# Altium PCB SintetivadorV00.PcbDoc
Units mm, origin at the board's own origin, x right, y up, seen from the top; angles counter-clockwise.
Board outline 36.32 x 39.5 mm, 2 copper layers (Top Layer, Bottom Layer), stack 1.571 mm thick; 43 components, 26 nets, 123 pads, 62 vias.
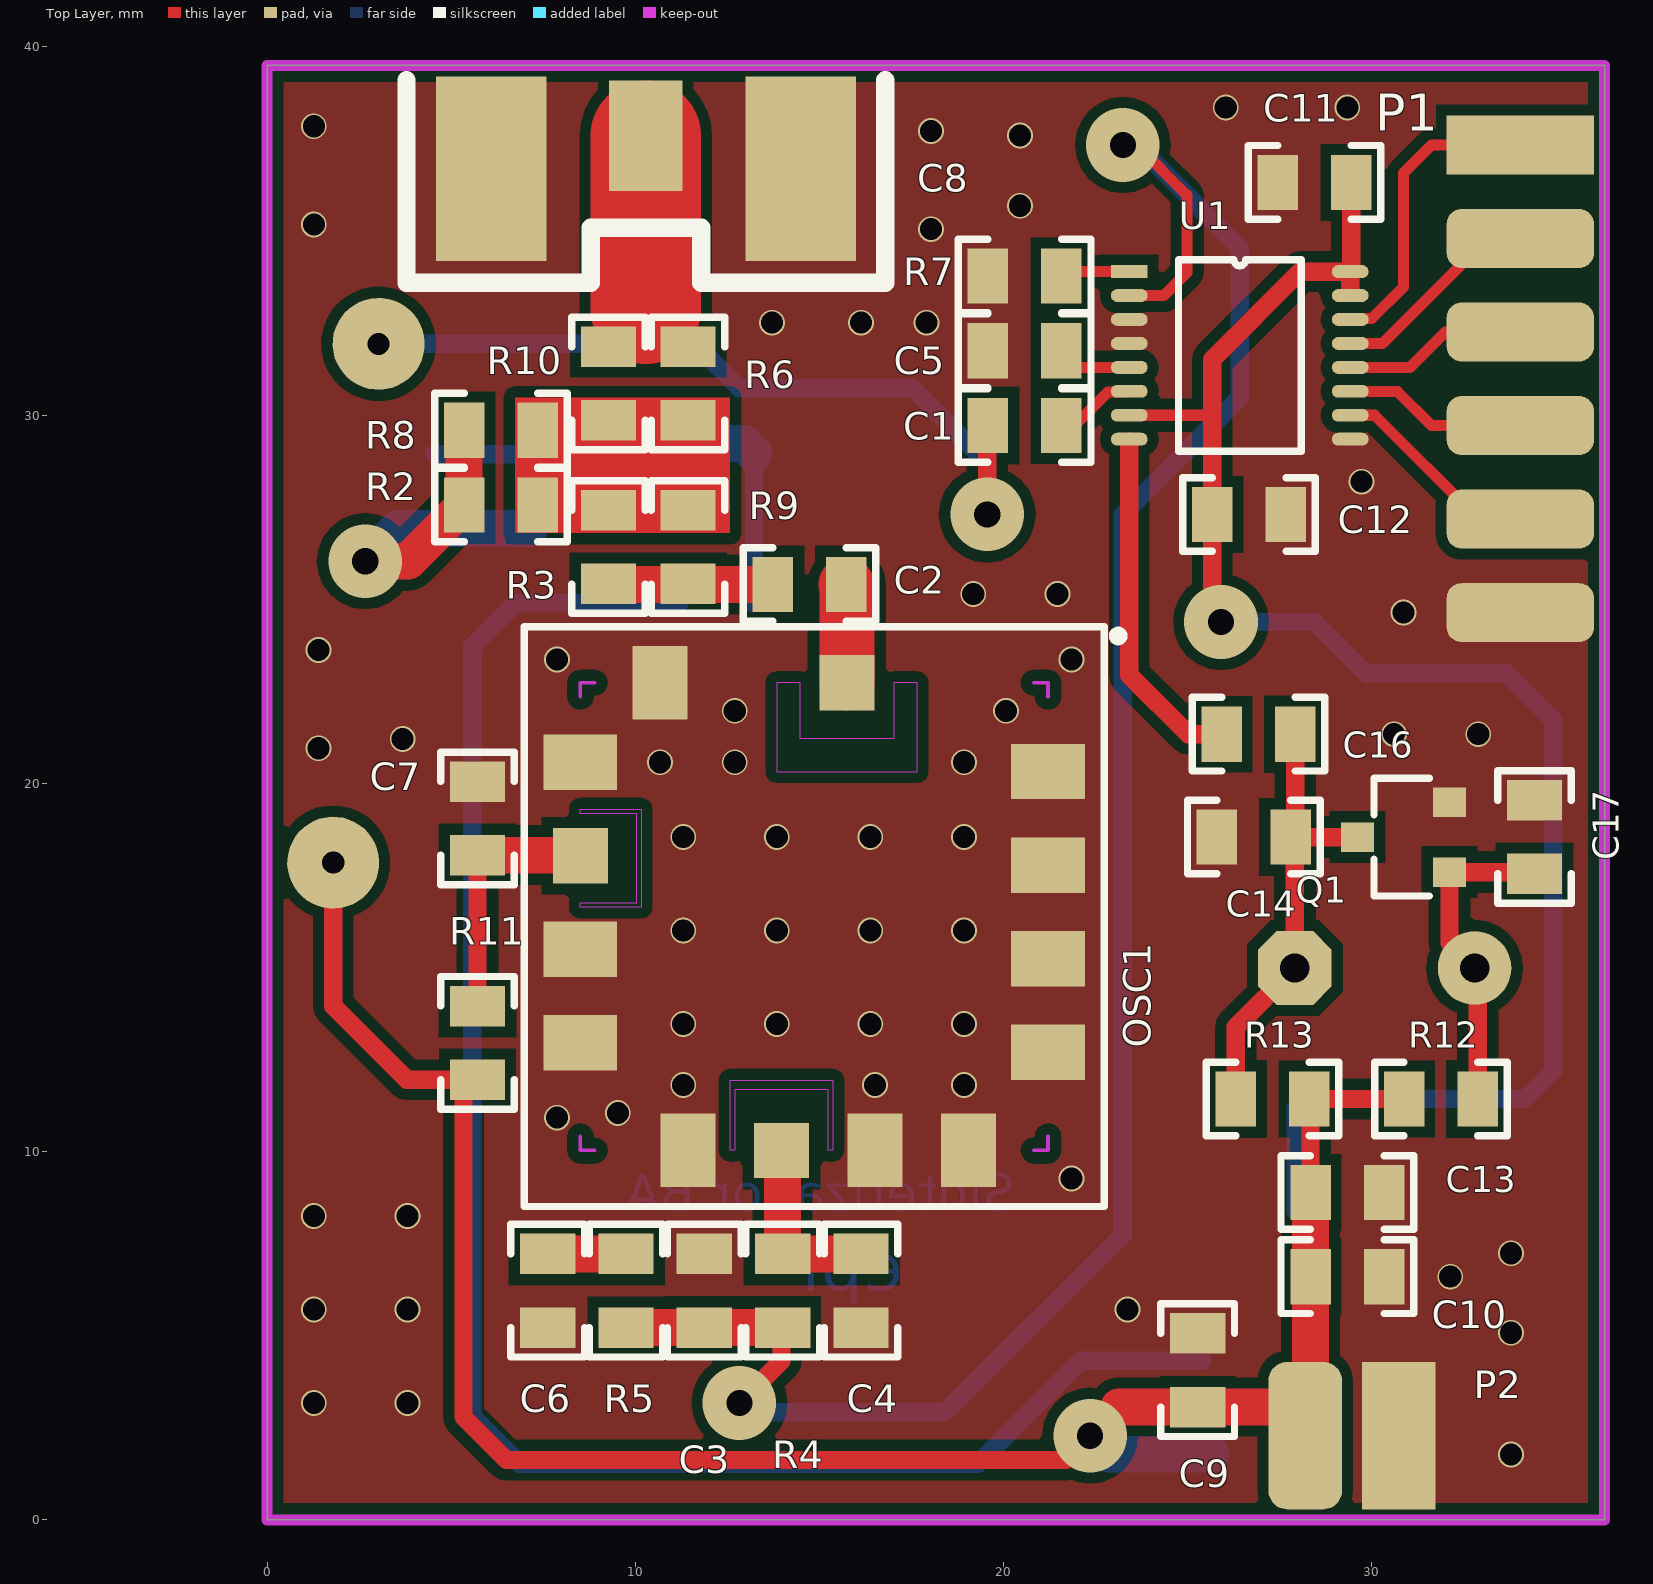
[diagram p0: Top Layer view]
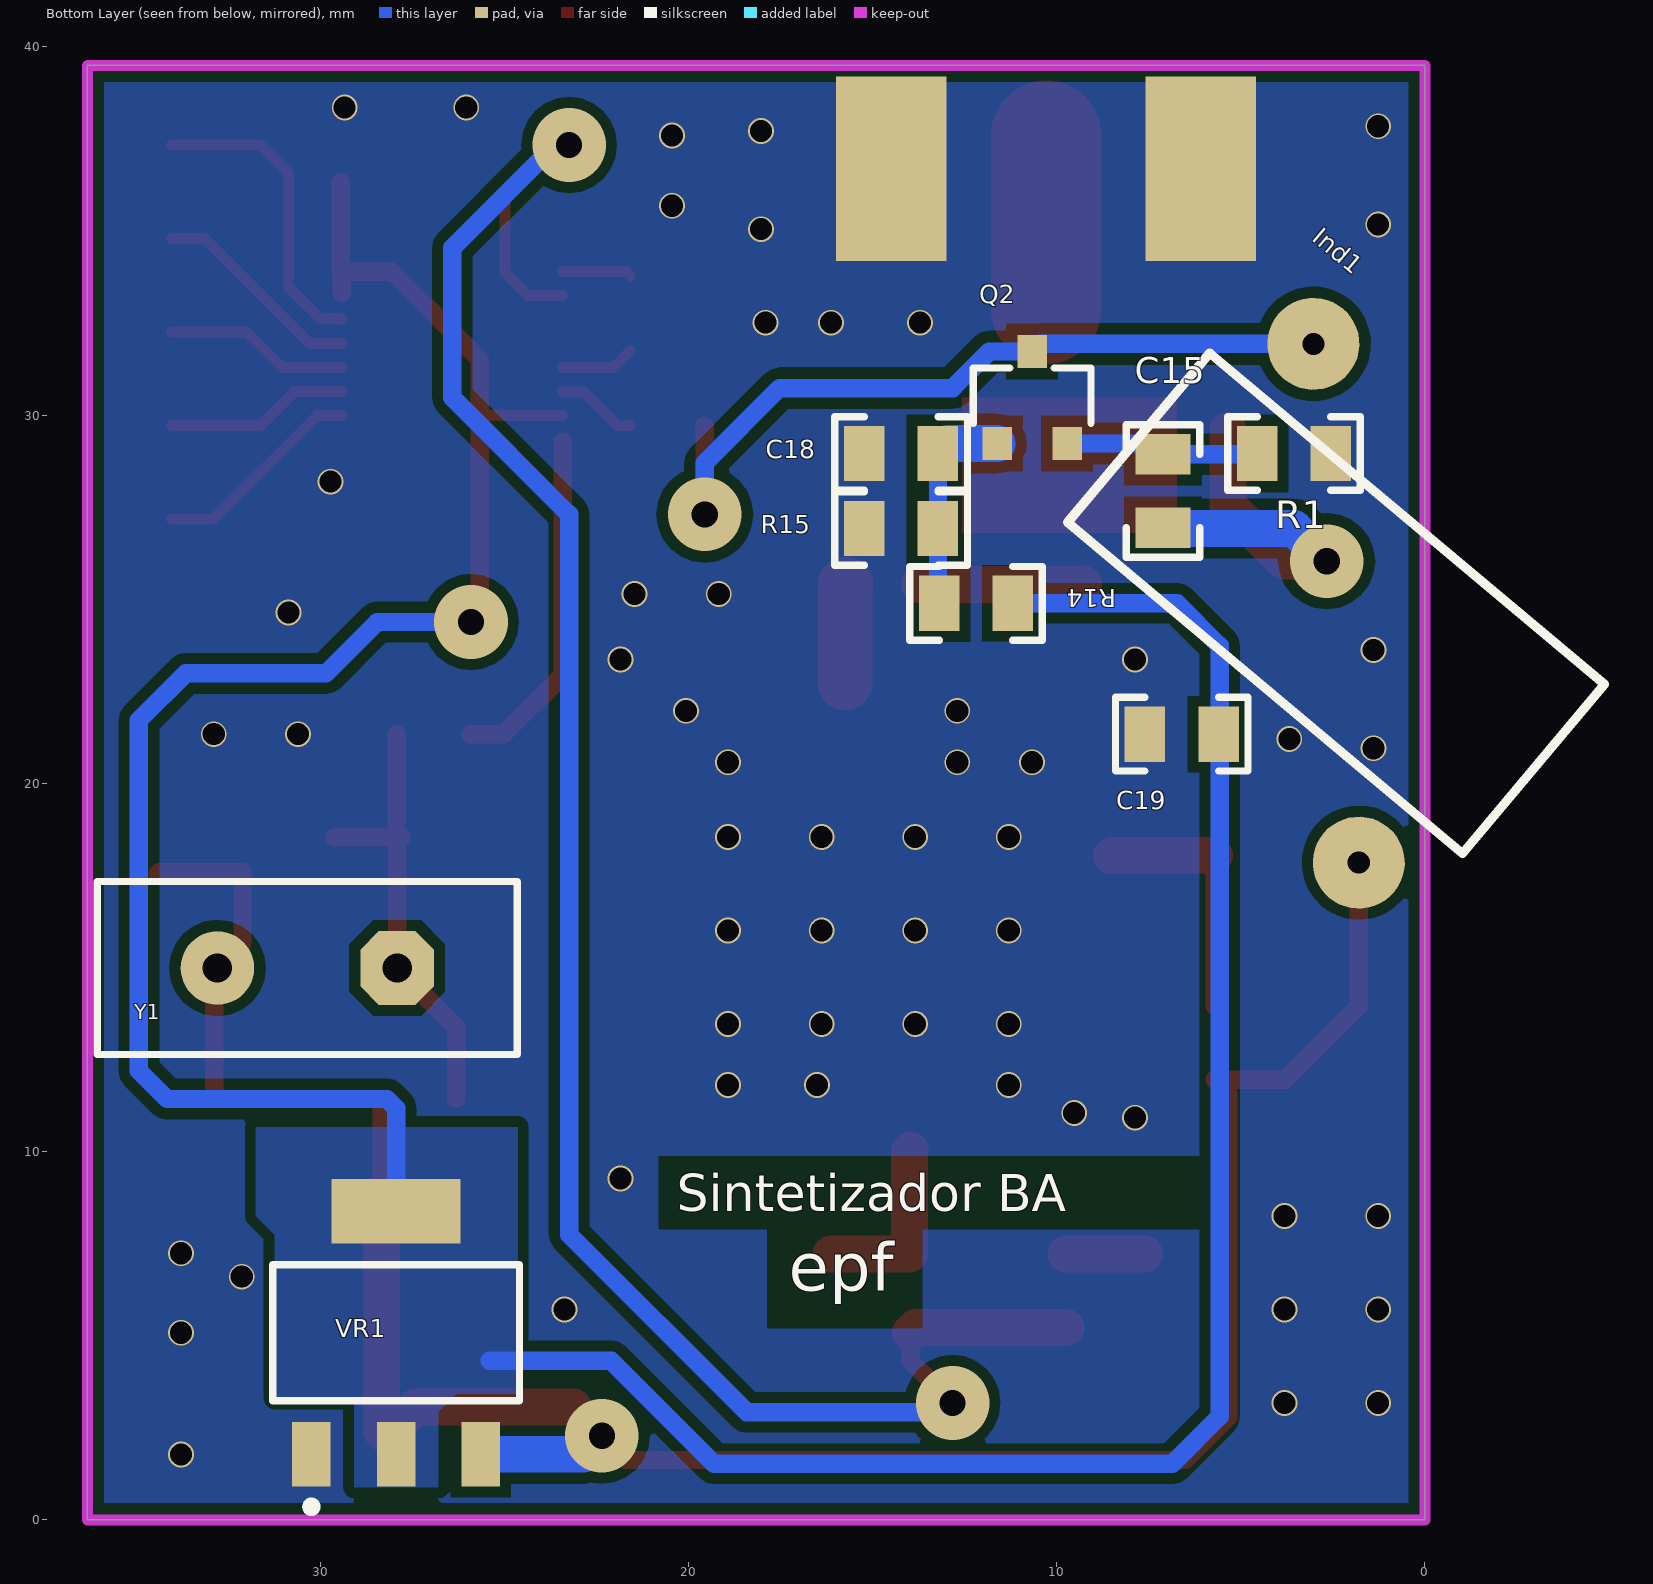
[diagram p1: Bottom Layer view, seen from below]

## Layer stack, top to bottom
Top Layer: signal copper 0.0356
Dielectric: core 1.5, FR-4, Dk 4.8
Bottom Layer: signal copper 0.0356

## Board outline
0,0 0,39.497 36.322,39.497 36.322,0

## Design rules (kind name [scope] priority, off if disabled: settings)
Clearance Clearance_1 [InNamedPolygon('RFGND')] p1: gap=0.4
Clearance [All] p2: gap=0.3
MinimumSolderMaskSliver [All] p1: minsoldermaskwidth=0
PolygonConnect [All] p1: connectstyle=Direct reliefconductorwidth=0.5 reliefentries=4 polygonreliefangle="90 Angle"
RoomDefinition Sintetizador_BA_Analog [InComponentClass('Sintetizador_BA_Analog')] p1: confinementstyle=ConfineIn formatcopy=TRUE lockcomponents=FALSE outline -5.969,-8.509 46.609,-8.509 46.609,50.546 -5.969,50.546
RoutingVias [All] p1: holewidth=0.6 width=2 viastyle="Through Hole" minholewidth=0.3 minwidth=1.27 maxholewidth=1 maxwidth=3
SilkscreenOverComponentPads [All] p1: minsilkscreentomaskgap=0.254
SolderMaskExpansion [All] p1: expansion=0.102
Width [All] p1: maxlimit=4 minlimit=0.2 preferedwidth=1
26 further rules are at their usual default settings.

## Components (designator, comment, footprint, x,y, rotation, side; value= is the part's Value field where it differs from the comment)
C1 "Capacitor" 0805_CAP 20.574,29.718 r180 top
C2 "Capacitor" 0805_CAP 14.732,25.4 r0 top
C3 "Capacitor" 0805_CAP 11.874,6.223 r270 top
C4 "Capacitor" 0805_CAP 16.129,6.223 r90 top
C5 "Capacitor" 0805_CAP 20.574,31.75 r0 top
C6 "Capacitor" 0805_CAP 7.62,6.223 r90 top
C7 "Capacitor" 0805_CAP 5.715,19.05 r270 top
C8 "SMA" SMAL2 10.287,37.592 r0 top
C9 "Capacitor" 0805_CAP 25.273,4.064 r270 top
C10 "Capacitor" 0805_CAP 29.337,6.604 r180 top
C11 "Capacitor" 0805_CAP 28.448,36.322 r0 top
C12 "Capacitor" 0805_CAP 26.67,27.305 r180 top
C13 "Capacitor" 0805_CAP 29.337,8.89 r180 top
C14 "Capacitor" 0805_CAP 26.797,18.542 r180 top
C15 "Capacitor" 0805_CAP 7.112,27.94 r270 bottom
C16 "Capacitor" 0805_CAP 26.924,21.336 r0 top
C17 "Capacitor" 0805_CAP 34.417,18.542 r270 top
C18 "Capacitor" 0805_CAP 14.224,28.956 r180 bottom
C19 "Capacitor" 0805_CAP 6.604,21.336 r180 bottom
Ind1 "Ind2" NTH12_2 2.413,24.892 r220 bottom
OSC1 "VCO" V140MC03 8.509,10.033 r0 top
P1 "SPI" HeaderHx6 34.036,37.338 r270 top
P2 "Header2" HeaderHx2 30.734,2.286 r180 top
Q1 "BFS17" SOT23 30.861,18.542 r90 top
Q2 "BFS17" SOT23 10.668,30.48 r180 bottom
R1 "Resistor" 0805_RES 3.556,28.956 r180 bottom
R2 "Resistor" 0805_RES 6.35,27.559 r180 top
R3 "Resistor" 0805_RES 9.271,26.416 r90 top
R4 "Resistor" 0805_RES 14.002,6.223 r90 top
R5 "Resistor" 0805_RES 9.747,6.223 r90 top
R6 "Resistor" 0805_RES 11.43,30.861 r270 top
R7 "Resistor" 0805_RES 20.574,33.782 r180 top
R8 "Resistor" 0805_RES 6.35,29.591 r180 top
R9 "Resistor" 0805_RES 11.43,26.416 r90 top
R10 "Resistor" 0805_RES 9.271,30.861 r270 top
R11 "Resistor" 0805_RES 5.715,12.954 r90 top
R12 "Resistor" 0805_RES 31.877,11.43 r0 top
R13 "Resistor" 0805_RES 27.305,11.43 r180 top
R14 "Resistor" 0805_RES 12.192,24.892 r0 bottom
R15 "Resistor" 0805_RES 14.224,26.924 r0 bottom
U1 "Sintetizador ADF4111" TSSOP16 26.416,31.623 r0 top
VR1 "Volt Reg" "SOT-223 - M3" 27.94,5.08 r180 bottom
Y1 "ECS-49-20-1" HC-49U 30.353,14.986 r0 bottom

## Footprints (in the part's own frame and the unit in brackets; to place one, negate y for a bottom-side part, rotate by r counter-clockwise, add the part's x,y. Pads: shape width x height; smd on the part's side, far side on the other; paste and mask are expansions set on the pad)
0805_CAP [mm]
  rect 1.1x1.5 smd: 1(-1,0) 2(1,0)
  silkscreen extent -1.8,-1 1.8,1, body extent -1,-0.62 1,0.63, height 0.78
0805_RES [mm]
  rect 1.1x1.5 smd: 1(-1,0) 2(1,0)
  silkscreen extent -1.8,-1 1.8,1, body extent -1,-0.62 1,0.63, height 0.78
HC-49U [mm] "Quartz Crystal, Thru-Hole; 2 Leads; Body 11.35 x 4.65 x 13.46 mm (LxWxH max)"
  oct 2x2 hole 0.8: 1(-2.44,0)
  round 2 hole 0.8: 2(2.44,0)
  silkscreen extent -5.7,-2.35 5.7,2.35
HeaderHx2 [mm]
  rect 2x4 smd: 1(0,0)
  rrect50% 2x4 smd: 2(2.54,0)
  body extent -1.27,-0.42 3.81,10.58, height 1.6
HeaderHx6 [mm]
  rect 1.6x4 smd: 1(0,0)
  rrect50% 1.6x4 smd: 2(2.54,0) 3(5.08,0) 4(7.62,0) 5(10.16,0) 6(12.7,0)
  body extent -1.27,-1.52 13.97,10.67, height 1.81
NTH12_2 [mm]
  round 2.5 hole 0.6: 1(-5,5) 2(5,-5)
  silkscreen extent -7,-3 7,3
SMAL2 [mm]
  rect 2x3 smd: 1(0,0)
  rect 3x5 smd: 2(-4.2,-0.9) 4(4.2,-0.9)
  rect 3x5 smd far side: 3(-4.2,-0.9) 5(4.2,-0.9)
  silkscreen extent -6.5,-4 6.5,1.5, body extent -4.76,-2.95 4.76,10.88, height 4.06
SOT23 [mm]
  rect 0.8x0.9 smd: 1(-0.95,-1.25) 2(0.95,-1.25) 3(0,1.25)
  silkscreen extent -1.6,-0.7 1.6,0.8, body extent -1.5,-1.25 1.5,1.25, height 1.05
"SOT-223 - M3" [mm] "SOT-223/SC-73; 4 Leads; Body 6.7 x 7.3 mm, inc. leads (LxW max)"
  rect 1.05x1.75 smd: 1(-2.3,-3.3) 2(0,-3.3) 3(2.3,-3.3)
  rect 3.5x1.75 smd: 2(0,3.3)
  silkscreen extent -3.35,-4.85 3.35,1.85, body extent -3.32,-3.67 3.38,3.53, height 1.85
TSSOP16 [mm]
  rect 1x0.35 smd: 1(-3,2.275)
  oval 1x0.35 smd: 2(-3,1.625) 3(-3,0.975) 4(-3,0.325) 5(-3,-0.325) 6(-3,-0.975) 7(-3,-1.625) 8(-3,-2.275) 9(3,-2.275) 10(3,-1.625) 11(3,-0.975) 12(3,-0.325) 13(3,0.325) 14(3,0.975) 15(3,1.625) 16(3,2.275)
  silkscreen extent -1.67,-2.6 1.67,2.6, body extent -3.2,-2.55 3.2,2.55, height 1.2
V140MC03 [mm]
  rect 1.5x1.5 smd: 1(5.461,0) 2(7.239,12.7) 3(0,8.001)
  rect 2x1.5 smd: 4(0,2.921) 4(0,5.461) 4(0,10.541) 4(12.7,2.667) 4(12.7,5.207) 4(12.7,7.747) 4(12.7,10.287)
  rect 1.5x2 smd: 4(2.159,12.7) 4(2.921,0) 4(8.001,0) 4(10.541,0)
  Top Layer keep-out region: 6.858,1.905 6.858,0 6.731,0 6.731,1.651 4.191,1.651 4.191,0 4.064,0 4.064,1.905
  Top Layer keep-out region: 9.144,10.287 9.144,12.7 8.509,12.7 8.509,11.176 5.969,11.176 5.969,12.7 5.334,12.7 5.334,10.287
  Top Layer keep-out region: 1.651,6.604 0,6.604 0,6.731 1.524,6.731 1.524,9.144 0,9.144 0,9.271 1.651,9.271
  Top Layer keep-out lines w0.1: 0,0.381 0,0 0.381,0 ; 0,12.319 0,12.7 0.381,12.7 ; 12.319,0 12.7,0 12.7,0.381 ; 12.319,12.7 12.7,12.7 12.7,12.319
  silkscreen extent -1.52,-1.52 14.73,14.22, body extent -0.1,-0.1 12.8,12.8, height 5

## Part data
C1 C2 C3 C4 C5 C6 C7 C9 C10 C11 C12 C13 C14 C15 C16 C17 C18 C19: library part Cap
OSC1: library part V140MC03
P1: library part ADF_SPI_GND
Q1 Q2: "NPN 1 GHz Wideband Transistor"
R1 R2 R3 R4 R5 R6 R7 R8 R9 R10 R11 R12 R13 R14 R15: library part Res
U1: library part ADF4111
VR1: "Voltage Regulator"
Y1: "Crystal Oscillator"

## Via types
v1: diameter 0.7, hole 0.6, Top Layer to Bottom Layer, 56 vias
v2: diameter 2, hole 0.711, Top Layer to Bottom Layer, 6 vias

## Nets (pads, with @x,y where several pads share a name; then routed paths per layer and width w, separated by ;. In a path a pad name is that pad's centre, name@x,y a point inside that pad or via, vN(x,y) a via of type N, cw(c..) or ccw(c..) an arc to the next point about the centre after c; other vN are vias at no path point)
3.3V: C11.2 C12.2 C19.2 R14.1 U1.7 U1.15 U1.16 VR1.2 | length 95.6
  Top Layer w0.3: U1.7 25.628,29.998 25.654,29.972
  Top Layer w0.5: v2(25.908,24.384) 25.67,24.622 C12.2 25.67,31.512 28.056,33.898 U1.16 ; U1.15@29.416,33.323 U1.16 ; C11.2 29.448,33.93 U1.16
  Bottom Layer w0.5: R14.1 6.731,24.892 5.575,23.736 5.575,2.807 6.858,1.524 19.304,1.524 22.098,4.318 25.4,4.318 ; v2(25.908,24.384) 28.448,24.384 29.845,22.987 33.655,22.987 34.925,21.717 34.925,12.192 34.163,11.43 28.194,11.43 27.94,11.176 VR1.2@27.94,8.38
GND: C3.1 C4.1 C5.1 C6.1 C7.1 C8.2 C8.3 C8.4 C8.5 C9.1 C10.1 C11.1 C12.1 C13.1 C14.2 C17.1 C18.1 C19.1 OSC1.4 P1.6 P2.1 Q1.2 R1.2 R7.2 R15.2 U1.3 U1.4 U1.9 VR1.1
  other v1: 33.782,1.778 1.27,3.175 3.81,3.175 33.782,5.08 1.27,5.715 3.81,5.715 23.368,5.715 32.131,6.604 33.782,7.239 1.27,8.255 3.81,8.255 21.844,9.271 7.874,10.922 9.525,11.049 11.303,11.811 16.51,11.811 18.923,11.811 11.303,13.462 13.843,13.462 16.383,13.462 18.923,13.462 11.303,16.002 13.843,16.002 16.383,16.002 18.923,16.002 11.303,18.542 13.843,18.542 16.383,18.542 18.923,18.542 10.668,20.574 12.7,20.574 18.923,20.574 1.397,20.955 3.683,21.209 30.607,21.336 32.893,21.336 12.7,21.971 20.066,21.971 7.874,23.368 21.844,23.368 1.397,23.622 30.861,24.638 19.177,25.146 21.463,25.146 29.718,28.194 13.716,32.512 16.129,32.512 17.907,32.512 18.034,35.052 1.27,35.179 20.447,35.687 20.447,37.592 18.034,37.719 1.27,37.846 26.035,38.354 29.337,38.354
LD: P1.1 U1.14 | length 8.4
  Top Layer w0.3: U1.14 29.441,32.623 30,32.623 30.861,33.484 30.861,36.576 31.623,37.338 P1.1
NetC1_1: C1.1 U1.6 | length 2.2
  Top Layer w0.3: C1.1 21.927,29.718 22.832,30.623 23.391,30.623 U1.6
NetC1_2: C1.2 Ind1.1 Q2.3 | length 21.7
  Top Layer w0.5: v2(19.558,27.305) 19.558,29.702 C1.2
  Bottom Layer w0.5: Ind1.1 10.462,31.936 Q2.3 11.831,31.73 12.827,30.734 17.526,30.734 19.558,28.702 v2(19.558,27.305)
NetC2_1: C2.1 R3.1 R9.1 | length 4.5
  Top Layer w1: R3.1 9.287,25.4 C2.1
NetC2_2: C2.2 OSC1.2 | length 2.7
  Top Layer w1.5: C2.2 15.748,25.384 OSC1.2
NetC3_2: C3.2 R4.1 R5.1 U1.2 | length 57.8
  Top Layer w0.3: U1.2 24.358,33.248 24.987,33.877 24.987,35.973 v2@23.622,37.338
  Top Layer w0.5: v2(12.827,3.175) 13.97,4.318 13.97,5.08 R4.1@13.97,5.334
  Top Layer w1: R5.1 C3.2 13.827,5.223 R4.1@13.97,5.08
  Bottom Layer w0.5: v2(12.827,3.175) 12.954,3.048 12.954,2.921 18.415,2.921 23.241,7.747 23.241,27.305 26.416,30.48 26.416,34.544 23.622,37.338 v2(23.241,37.338)
NetC4_2: C4.2 OSC1.1 R4.2 | length 5
  Top Layer w1: OSC1.1 14.002,10.001 R4.2 C4.2
NetC5_2: C5.2 U1.5 | length 2
  Top Layer w0.3: C5.2 22.026,31.298 U1.5
NetC6_2: C6.2 R5.2 | length 2.1
  Top Layer w1: C6.2 R5.2
NetC7_2: C7.2 OSC1.3 R11.2 | length 6.9
  Top Layer w0.5: R11.2 C7.2
  Top Layer w1: C7.2 8.493,18.05 OSC1.3
NetC8_1: C8.1 R6.1 R10.1 | length 4.7
  Top Layer w3: 10.287,32.893 C8.1
NetC14_1: C14.1 C16.2 Q1.3 R13.2 Y1.1 | length 12.5
  Top Layer w0.5: R13.2 26.305,13.378 Y1.1 27.913,18.426 C14.1 ; C16.2 27.924,18.669 C14.1 ; Q1.3 C14.1
NetC15_1: C15.1 Q2.2 R1.1 | length 5.3
  Bottom Layer w0.5: R1.1 4.572,28.94 C15.1 7.402,29.23 Q2.2
NetC15_2: C15.2 R2.2 R8.2 | length 10.2
  Top Layer w1: v2(2.667,26.035) 3.826,26.035 R2.2 R8.2
  Bottom Layer w1: v2(2.667,26.035) 3.556,26.924 7.112,26.924 C15.2
NetC17_2: C17.2 Q1.1 R12.2 Y1.2 | length 8.8
  Top Layer w0.5: R12.2 32.877,14.902 Y1.2 32.111,15.668 Q1.1 34.367,17.592 C17.2
NetC18_2: C18.2 Q2.1 R14.2 R15.1 | length 5.8
  Bottom Layer w0.5: R14.2 13.224,24.924 R15.1 C18.2
  Bottom Layer w1: Q2.1 12.95,29.23 C18.2
NetP1_2: P1.2 U1.13 | length 5.8
  Top Layer w0.3: U1.13 30.297,31.948 33.147,34.798 P1.2
NetP1_3: P1.3 U1.12 | length 5
  Top Layer w0.3: U1.12 31.044,31.298 32.004,32.258 P1.3
NetP1_4: P1.4 U1.11 | length 5
  Top Layer w0.3: U1.11 30.693,30.648 31.623,29.718 P1.4
NetP1_5: P1.5 U1.10 | length 5.8
  Top Layer w0.3: U1.10 30.073,29.998 32.893,27.178 P1.5
NetR2_1: R2.1 R3.2 R6.2 R8.1 R9.2 R10.2
NetR7_1: R7.1 U1.1 | length 1.9
  Top Layer w0.3: R7.1 21.69,33.898 U1.1
REF: C16.1 U1.8 | length 9.5
  Top Layer w0.5: U1.8@23.416,29.273 23.416,22.939 25.019,21.336 C16.1
VCC: C9.2 C10.2 C13.2 Ind1.2 P2.2 R11.1 R12.1 R13.1 VR1.3 | length 56.1
  Top Layer w0.5: Ind1.2 1.797,13.951 3.794,11.954 R11.1 5.334,11.573 5.334,2.794 6.503,1.625 21.691,1.625 v2(22.352,2.286) ; P2.2@28.194,1.905 P2.2 ; C13.2 28.337,11.398 R13.1 R12.1
  Top Layer w1: 23.13,3.064 C9.2 27.416,3.064 P2.2 28.337,2.429 C10.2 C13.2
  Bottom Layer w1: v2@22.858,1.78 VR1.3

## Polygon pours and split planes (outlines as drawn)
GND on Bottom Layer "BOTTOMGND" (solid, remove dead copper): 0,0 0,39.497 36.322,39.497 36.322,0
3.3V on Bottom Layer "B3.3V" (solid, remove dead copper): 29.083,0.889 26.797,0.889 26.797,2.921 26.289,3.429 24.638,3.429 24.638,10.668 31.75,10.668 31.75,8.255 31.369,7.874 31.242,7.747 31.242,3.302 29.21,3.302 29.083,3.175
GND on Top Layer "TOPGND" (solid, remove dead copper): 0,0 0,39.497 36.322,39.497 36.322,0

## Keep-outs
Keep-Out Layer:
  the board outline again, w0.3

## Other copper
Top Layer:
  rectangle net NetR2_1: 6.731,26.797 12.573,30.48
Bottom Layer:
  text "Sintetizador BA" at 20.32,8.382 h1
  text "epf" at 17.272,6.223 h1.3

## Silkscreen, mask and mechanical layers (free items; w line width, h text height)
Bottom Overlay:
  text "Sintetizador BA" at 20.32,8.382 h1
  text "epf" at 17.272,6.223 h1.3

## Dimensions
0,0 to 36.322,0 on Mechanical 1
0,0 to 0,39.497 on Mechanical 1